# Altium PCB ARM2-2.5.PcbDoc (part 1 of 2)
Units mil, origin at the board's own origin, x right, y up, seen from the top; angles counter-clockwise.
Board outline 3929.03 x 3937.01 mil, 4 copper layers (Top Layer, VCC, GND, Bottom Layer); 147 components, 96 nets, 586 pads, 225 vias.
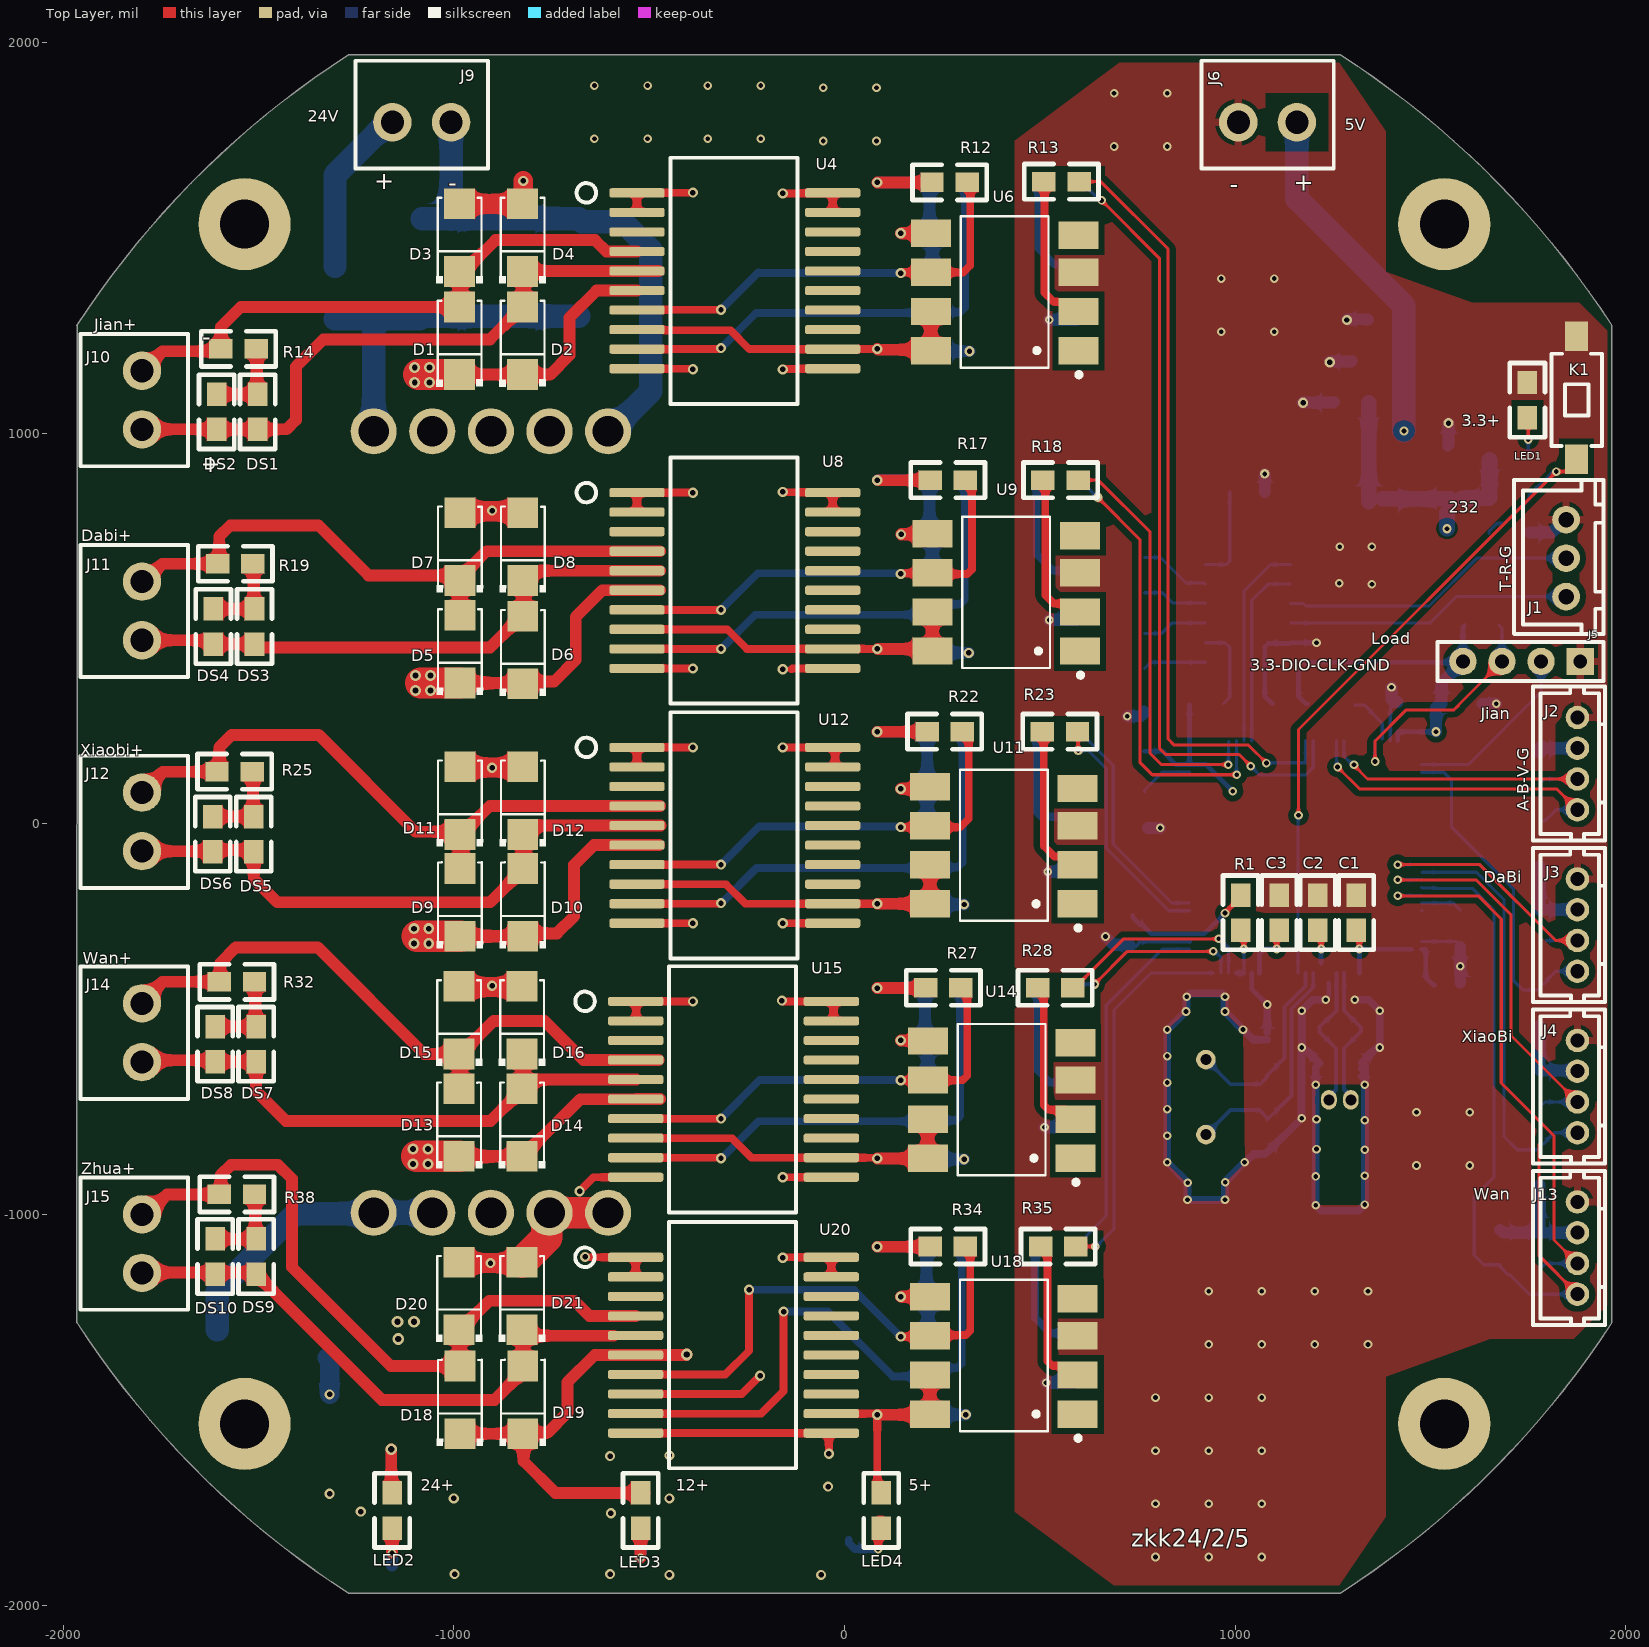
[diagram p0: Top Layer view]
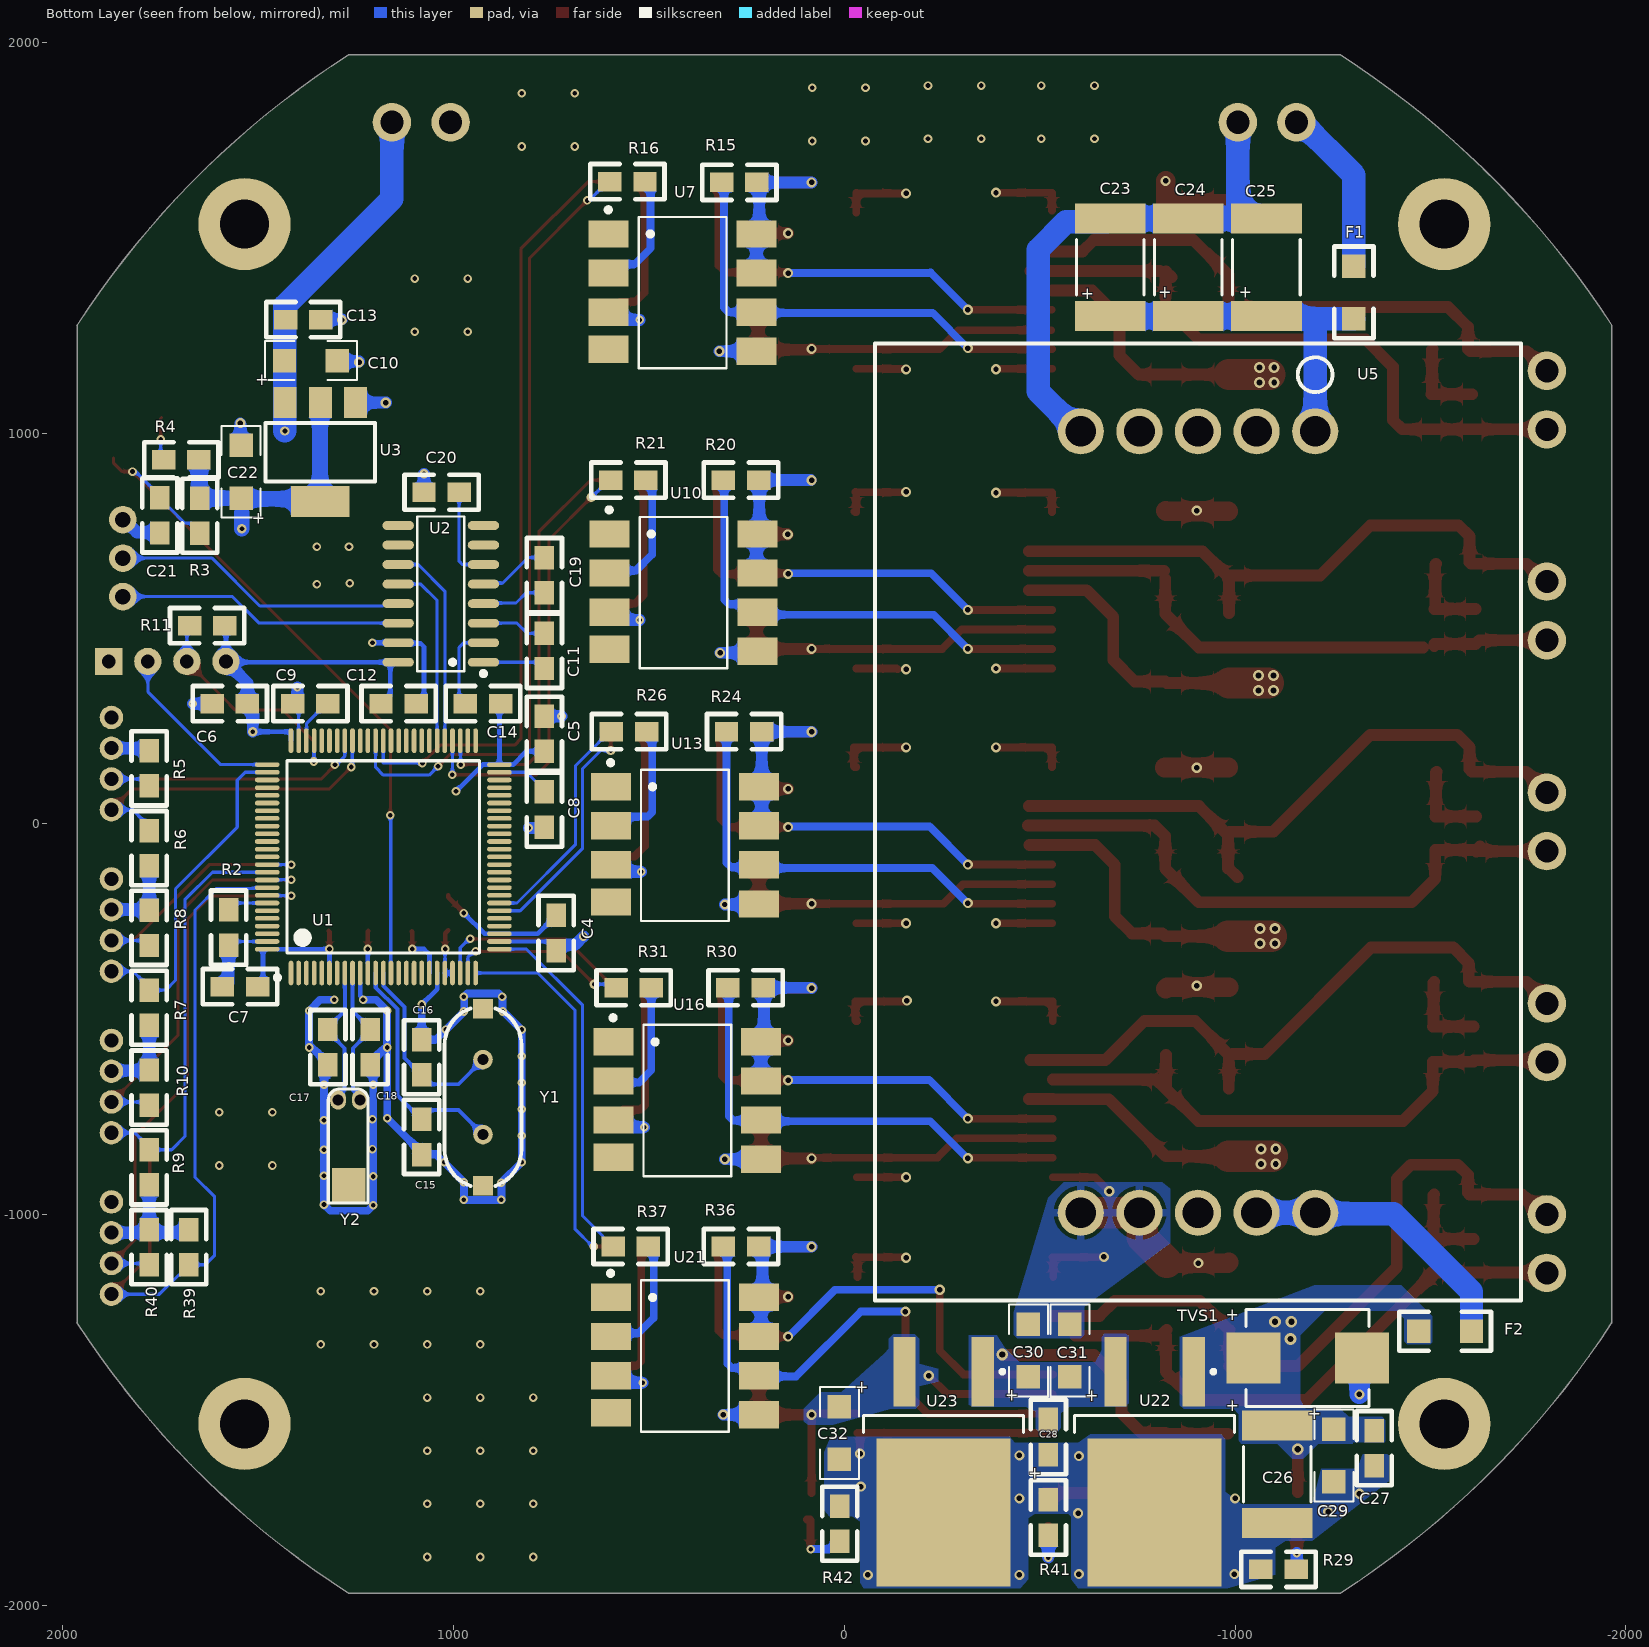
[diagram p1: Bottom Layer view, seen from below]
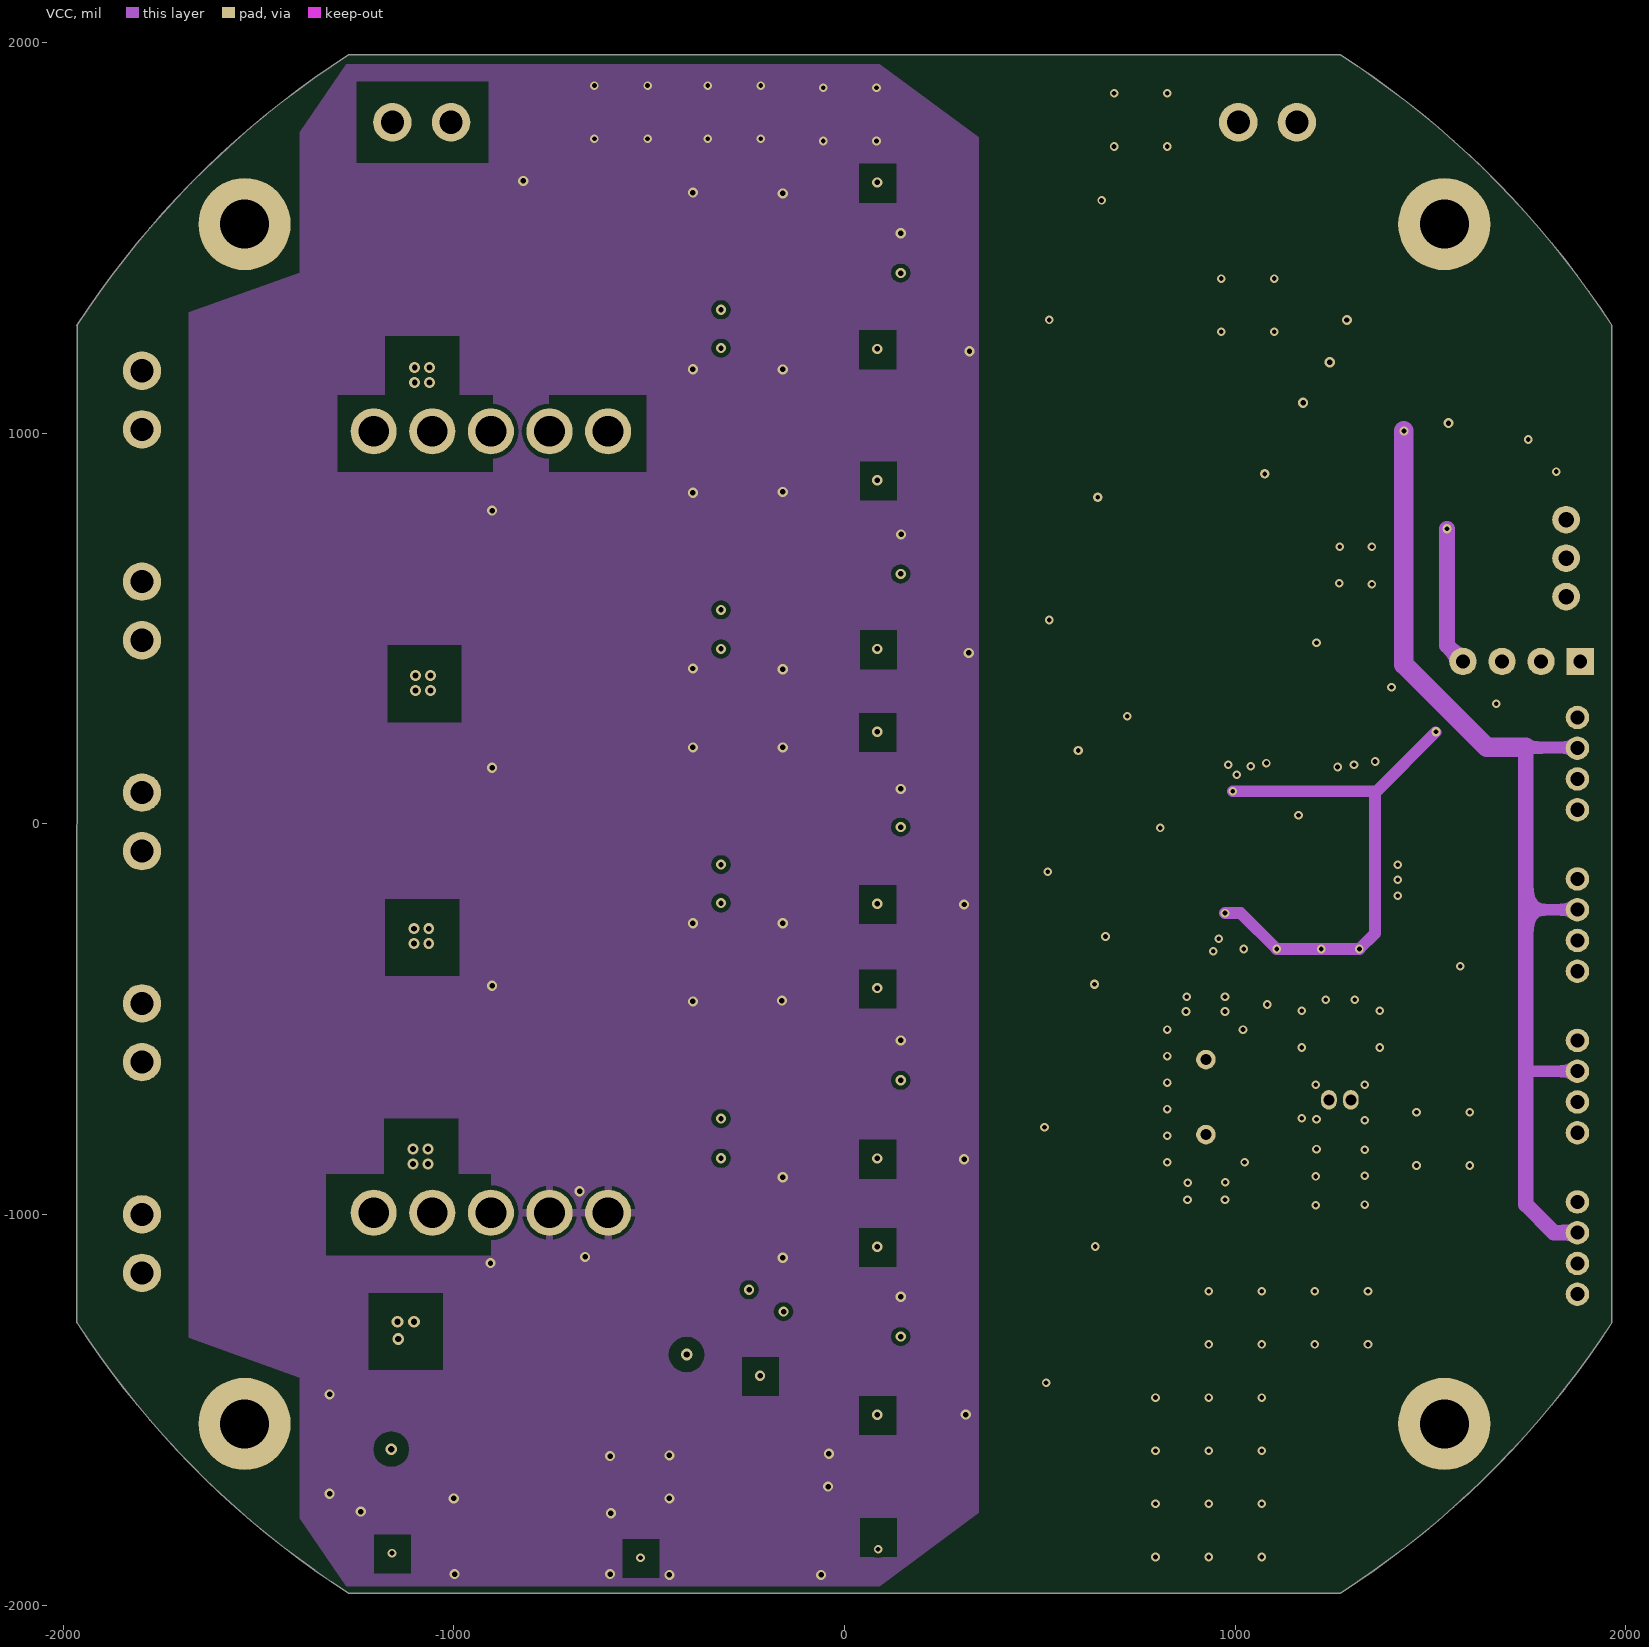
[diagram p2: VCC]
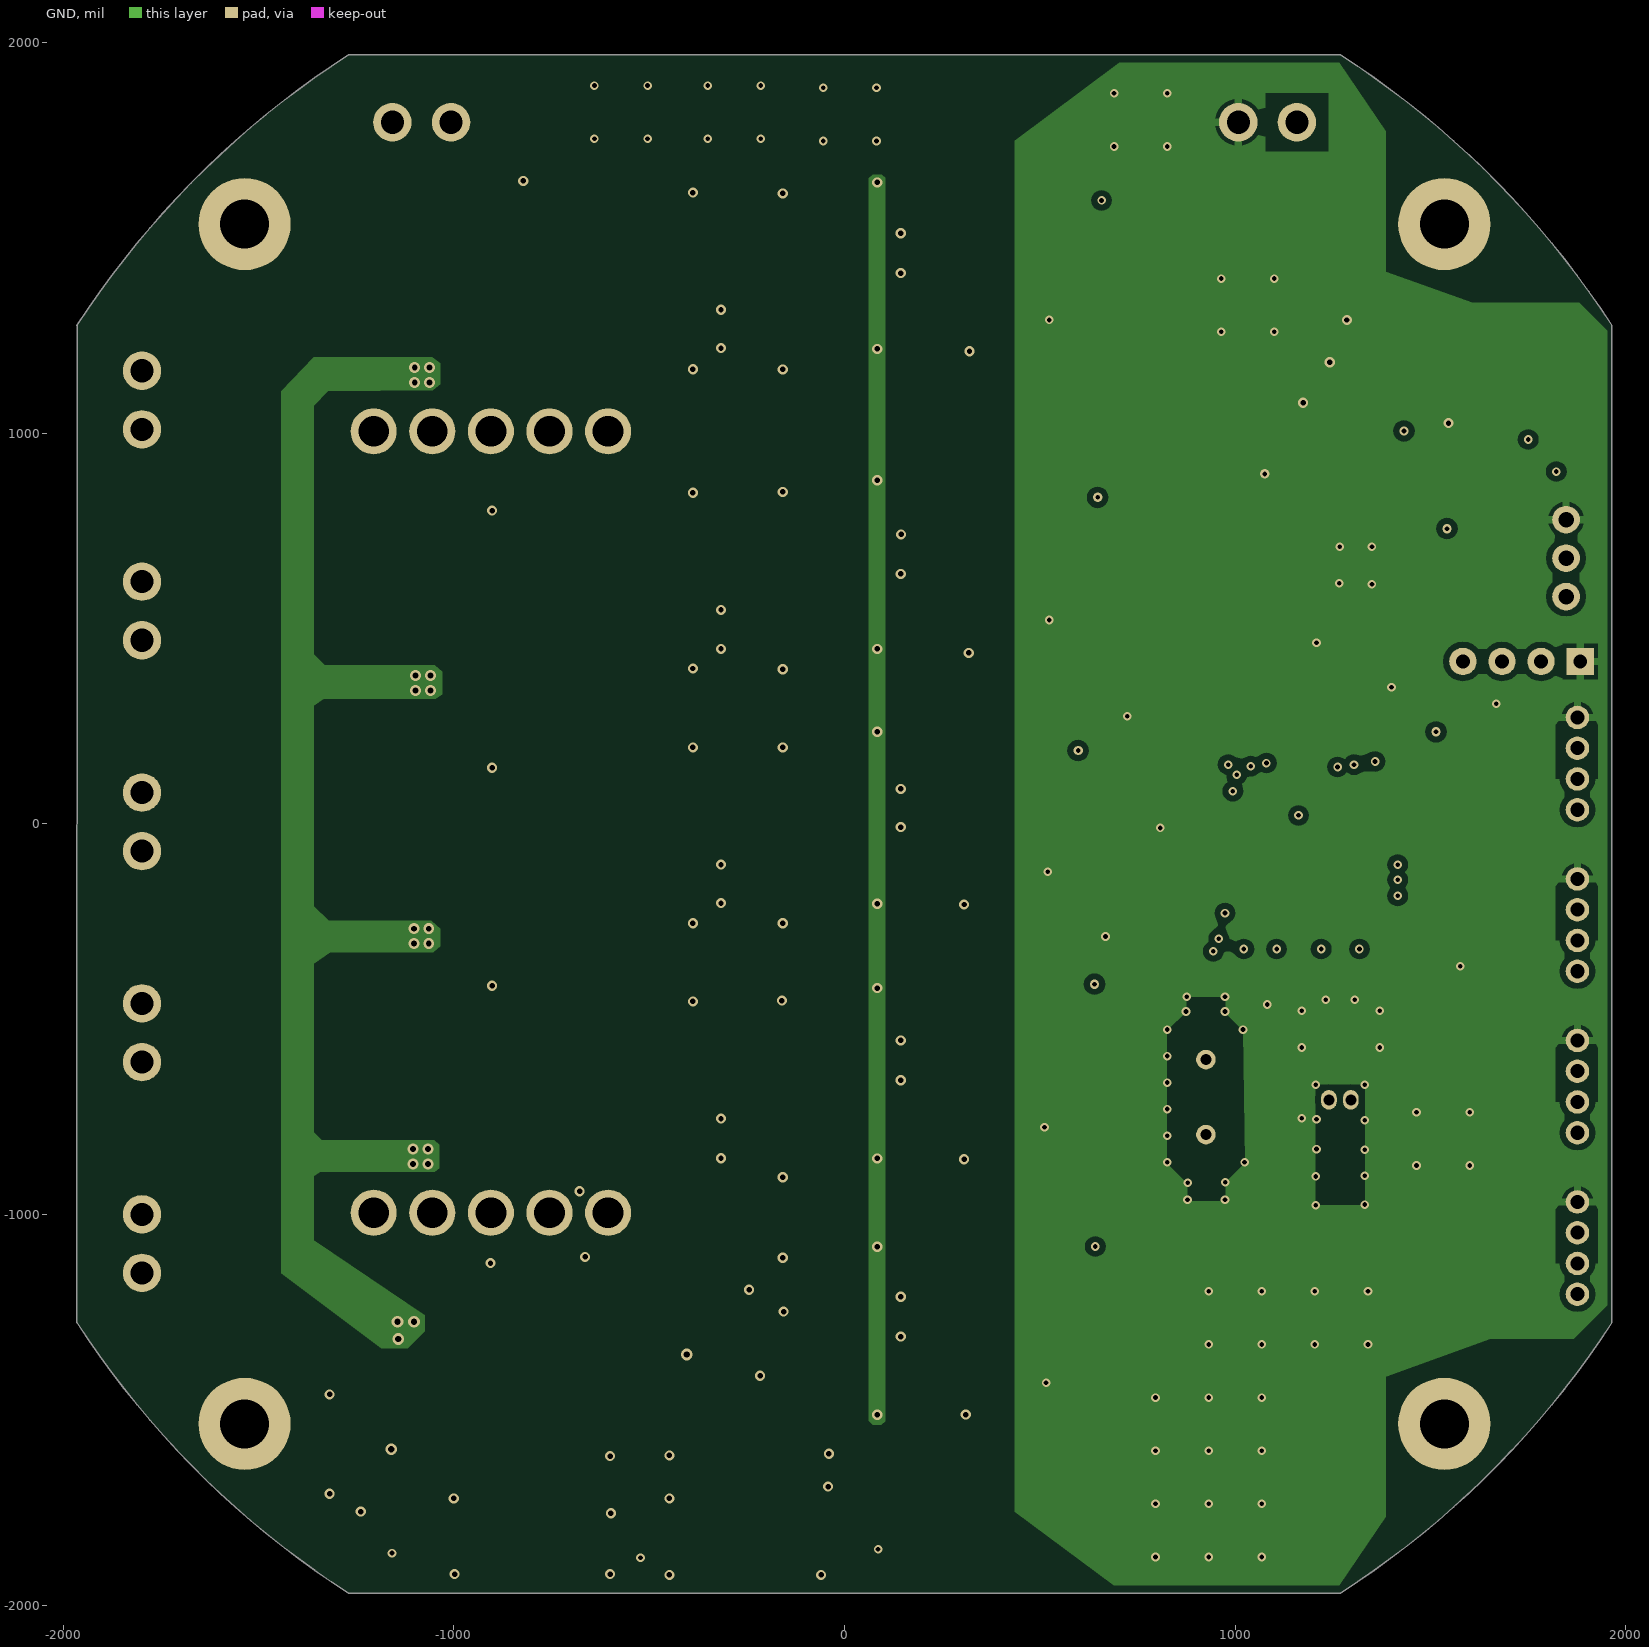
[diagram p3: GND]

## Layer stack, top to bottom
Top Solder: solder mask 0.4, Solder Resist, Dk 3.5
Top Layer: signal copper 1.4
Dielectric1: core 12.6, FR-4, Dk 4.8
VCC: signal copper 1.4
Dielectric2: prepreg 12.6, FR-4, Dk 4.8
GND: signal copper 1.4
Dielectric3: core 12.6, FR-4, Dk 4.8
Bottom Layer: signal copper 1.4
Bottom Solder: solder mask 0.4, Solder Resist, Dk 3.5

## Board outline
-1964.34,-1276.22 -1964,1275.83 -1964.6,1275.83 cw(c0,0) -1269.8,1968.5 1269.8,1968.5 cw(c0,0) 1964.34,1276.22 1964,1276 1964,-1275.83 1964.42,-1276.1 cw(c0,0) 1269.8,-1968.5 -1269.8,-1968.5 cw(c0,0)

## Design rules (kind name [scope] priority, off if disabled: settings)
Clearance GND1 [InNet('GND1')] p1: gap=15 ignorepadtopadclearanceinfootprint=TRUE
Clearance netcf [InNet('NetF1_1')  or InNet('NetC23_1')or InNet('NetC23_2')] p2: gap=30 ignorepadtopadclearanceinfootprint=TRUE
Clearance 3.3 [InNet('+3.3V')] p3: gap=15 ignorepadtopadclearanceinfootprint=TRUE
Clearance +5V [InNet('+5V')] p4: gap=20 ignorepadtopadclearanceinfootprint=FALSE
Clearance V5 [InNet('VCC_5V')] p5: gap=20 ignorepadtopadclearanceinfootprint=TRUE
Clearance Polygon [InNet('VCC_24V') or InNet('OUT1') or  InNet('OUT2') or  InNet('OUT3') or  InNet('OUT4') or  InNet('OUT5') or  InNet('OUT6') or  InNet('OUT7') or  InNet('OUT8') or  InNet('OUT9') or  InNet('OUT10') OR InNet('VCC_12V')] p6: gap=30 ignorepadtopadclearanceinfootprint=TRUE except(12: THPad-THPad THPad-Fill THPad-Poly THPad-Region)
Clearance [All] p7: gap=11 ignorepadtopadclearanceinfootprint=TRUE
FabricationTestPointUsage TestPointUsage [All] p1: valid=0 allowmultiple=FALSE
FabricationTestpoint Testpoint [All] p1: side=3 testpointundercomponent=TRUE minsize=40 maxsize=100 preferedsize=60 minholesize=0 maxholesize=40 preferedholesize=32 testpointgrid=1 allowsidetop=TRUE allowsidebottom=TRUE usegrid=TRUE gridtolerance=0.01
HoleSize [All] p1: absolutevalues=TRUE maxlimit=150 minlimit=10 maxpercent=80.000 minpercent=20.000
MinimumSolderMaskSliver [All] p1: minsoldermaskwidth=2
PlaneClearance [InNet('GND1')] p1: clearance=10
PolygonConnect PGND2B [OnBottomLayer{ InNet('GND2') }] p1: thpad.connectstyle=Relief thpad.reliefconductorwidth=20 thpad.reliefentries=4 thpad.polygonreliefangle="90 Angle" thpad.airgapwidth=10 smdpad.connectstyle=Direct smdpad.reliefconductorwidth=10 smdpad.reliefentries=4 smdpad.polygonreliefangle="90 Angle" smdpad.airgapwidth=10 via.connectstyle=Direct via.reliefconductorwidth=10 via.reliefentries=4 via.polygonreliefangle="90 Angle" via.airgapwidth=10
PolygonConnect PV24 [InNet('VCC_24V')] p2: thpad.connectstyle=Relief thpad.reliefconductorwidth=50 thpad.reliefentries=4 thpad.polygonreliefangle="90 Angle" thpad.airgapwidth=8 smdpad.connectstyle=Direct smdpad.reliefconductorwidth=30 smdpad.reliefentries=4 smdpad.polygonreliefangle="90 Angle" smdpad.airgapwidth=12 via.connectstyle=Direct via.reliefconductorwidth=10 via.reliefentries=4 via.polygonreliefangle="90 Angle" via.airgapwidth=10
PolygonConnect PV12 [InNet('VCC_12V')] p3: thpad.connectstyle=Relief thpad.reliefconductorwidth=10 thpad.reliefentries=4 thpad.polygonreliefangle="90 Angle" thpad.airgapwidth=10 smdpad.connectstyle=Direct smdpad.reliefconductorwidth=10 smdpad.reliefentries=4 smdpad.polygonreliefangle="90 Angle" smdpad.airgapwidth=10 via.connectstyle=Direct via.reliefconductorwidth=10 via.reliefentries=4 via.polygonreliefangle="90 Angle" via.airgapwidth=10
PolygonConnect PV5 [InNet('VCC_5V')] p4: connectstyle=Direct reliefconductorwidth=10 reliefentries=4 polygonreliefangle="90 Angle" airgapwidth=10
PolygonConnect PGND1 [InNet('GND1')] p5: thpad.connectstyle=Relief thpad.reliefconductorwidth=20 thpad.reliefentries=4 thpad.polygonreliefangle="90 Angle" thpad.airgapwidth=10 smdpad.connectstyle=Direct smdpad.reliefconductorwidth=12 smdpad.reliefentries=4 smdpad.polygonreliefangle="90 Angle" smdpad.airgapwidth=10 via.connectstyle=Direct via.reliefconductorwidth=12 via.reliefentries=4 via.polygonreliefangle="90 Angle" via.airgapwidth=10
PolygonConnect PGND2D [InComponent('D3')or  InComponent('D4') or InComponent('D7')or InComponent('D8')or InComponent('D11')or InComponent('D12')or InComponent('D15')or InComponent('D16')or InComponent('D20')or InComponent('D21')or  InComponent('C3')or  InComponent('C2')or   InComponent('C1')] p6: connectstyle=Direct reliefconductorwidth=10 reliefentries=4 polygonreliefangle="90 Angle" airgapwidth=10
PolygonConnect PGND2 [InNet('GND2')] p7: thpad.connectstyle=Relief thpad.reliefconductorwidth=20 thpad.reliefentries=4 thpad.polygonreliefangle="90 Angle" thpad.airgapwidth=10 smdpad.connectstyle=Relief smdpad.reliefconductorwidth=20 smdpad.reliefentries=4 smdpad.polygonreliefangle="90 Angle" smdpad.airgapwidth=10 via.connectstyle=Direct via.reliefconductorwidth=12 via.reliefentries=4 via.polygonreliefangle="90 Angle" via.airgapwidth=12
PolygonConnect [All] p8: connectstyle=Relief reliefconductorwidth=10 reliefentries=4 polygonreliefangle="90 Angle" airgapwidth=10
RoutingVias [All] p1: holewidth=7.5 width=15 viastyle="Through Hole" minholewidth=5 minwidth=10 maxholewidth=28 maxwidth=50
SilkToSilkClearance [All] p1: silktosilkclearance=1
SilkToSolderMaskClearance SilkscreenOverComponentPads [IsPad] p1: minsilkscreentomaskgap=1 clearancetoexposedcopper=TRUE
SolderMaskExpansion [All] p1: expansion=4 istentingtop=FALSE
Width [All] p1: maxlimit=200 minlimit=8 preferedwidth=10 toplayer_prefwidth=8 minimp=50.000000 maximp=50.000000 favimp=50.000000
23 further rules are at their usual default settings.

## Components (designator, comment, footprint, x,y, rotation, side; value= is the part's Value field where it differs from the comment)
C1 "104" 0805 1310,-272 r90 top
C2 "104" 0805 1211.33,-272 r90 top
C3 "104" 0805 1112.67,-272 r90 top
C4 "104" 0805 738,-234 r270 bottom
C5 "104" 0805 768,186 r90 bottom
C6 "104" 0805 1528,308 r0 bottom
C7 "104" 0805 1502,-416 r0 bottom
C8 "4.7uF" 0805 768,-8 r90 bottom
C9 "4.7uF" 0805 1412,308 r180 bottom
C10 "Cap Pol1" 钽电容小 1368,1180.83 r0 bottom value=10uF
C11 "104" 0805 768,488 r270 bottom
C12 "104" 0805 1186,308 r180 bottom
C13 "104" 0805 1340,1290.83 r0 bottom
C14 "104" 0805 970,308 r180 bottom
C15 "22pF" 0805 1082,-846 r90 bottom
C16 "22pF" 0805 1082,-552 r270 bottom
C17 "22pF" 0805 1322,-616 r90 bottom
C18 "22pF" 0805 1214,-616 r90 bottom
C19 "104" 0805 768,682 r270 bottom
C20 "104" 0805 1076,849 r180 bottom
C21 "104" 0805 1752,834.87 r270 bottom
C22 "Cap Pol1" 钽电容小 1539,899 r270 bottom value=10uF
C23 "Cap Pol1" 钽电容大 -680.15,1424.62 r180 bottom value=22uF
C24 "Cap Pol1" 钽电容大 -880.15,1424.62 r180 bottom value=100uF
C25 "Cap Pol1" 钽电容大 -1080.15,1424.62 r180 bottom value=100uF
C26 "Cap Pol1" 钽电容大 -1108,-1664 r0 bottom value=100uF
C27 "0.1uF" 0805 -1356,-1642.5 r90 bottom
C28 "0.1uF" 0805 -522,-1614 r90 bottom
C29 "Cap Pol1" 钽电容小 -1248,-1614 r90 bottom value=2.2uF
C30 "Cap Pol1" 钽电容小 -476,-1350 r270 bottom value=1uF
C31 "Cap Pol1" 钽电容小 -582,-1350 r270 bottom value=2.2uF
C32 "Cap Pol1" 钽电容小 18,-1556 r90 bottom value=1uF
D1 "Diode 1N4149" 肖特基二极管SS34 -984,1236.8 r90 top
D2 "Diode 1N4149" 肖特基二极管SS34 -822.85,1236.8 r90 top
D3 "Diode 1N4149" 肖特基二极管SS34 -984,1500.8 r90 top
D4 "Diode 1N4149" 肖特基二极管SS34 -822.85,1500.8 r90 top
D5 "Diode 1N4149" 肖特基二极管SS34 -983.15,447.39 r90 top
D6 "Diode 1N4149" 肖特基二极管SS34 -822,445.39 r90 top
D7 "Diode 1N4149" 肖特基二极管SS34 -983.15,709.96 r90 top
D8 "Diode 1N4149" 肖特基二极管SS34 -822,709.96 r90 top
D9 "Diode 1N4149" 肖特基二极管SS34 -983.15,-200.61 r90 top
D10 "Diode 1N4149" 肖特基二极管SS34 -822,-200.61 r90 top
D11 "Diode 1N4149" 肖特基二极管SS34 -983.15,59.96 r90 top
D12 "Diode 1N4149" 肖特基二极管SS34 -822,59.96 r90 top
D13 "Diode 1N4149" 肖特基二极管SS34 -985.15,-764 r90 top
D14 "Diode 1N4149" 肖特基二极管SS34 -824,-764 r90 top
D15 "Diode 1N4149" 肖特基二极管SS34 -985.15,-502.04 r90 top
D16 "Diode 1N4149" 肖特基二极管SS34 -824,-502.04 r90 top
D18 "Diode 1N4149" 肖特基二极管SS34 -983.15,-1474 r90 top
D19 "Diode 1N4149" 肖特基二极管SS34 -822,-1474 r90 top
D20 "Diode 1N4149" 肖特基二极管SS34 -985.15,-1208 r90 top
D21 "Diode 1N4149" 肖特基二极管SS34 -824,-1208 r90 top
DS1 "LED" 0805 -1502,1010 r90 top
DS2 "LED" 0805 -1607,1100 r270 top
DS3 "LED" 0805 -1510,460.5 r90 top
DS4 "LED" 0805 -1615,550.5 r270 top
DS5 "LED" 0805 -1512,-71 r90 top
DS6 "LED" 0805 -1617,19 r270 top
DS7 "LED" 0805 -1506,-608.5 r90 top
DS8 "LED" 0805 -1611,-518.5 r270 top
DS9 "LED" 0805 -1506,-1152 r90 top
DS10 "LED" 0805 -1611,-1062 r270 top
F1 "THERMAL FUSE" 1206 -1304,1428 r270 bottom
F2 "THERMAL FUSE" 1206 -1605,-1298 r0 bottom
J1 "CON3" CON3BB 1846.87,680.42 r90 top
J2 "CON4" CONN4B 1876,154.63 r90 top
J3 "CON4" CONN4B 1876,-258.7 r90 top
J4 "CON4" CONN4B 1876,-672.04 r90 top
J5 "CON4" CON4 1732.87,416 r0 top
J6 "CON2" CONN-TH_2P-P3.81_DB2EVC-3.81-2P-BK 1083,1796 r180 top
J9 "CON2" CONN-TH_2P-P3.81_DB2EVC-3.81-2P-BK -1082,1796 r180 top
J10 "CON2" CONN-TH_2P-P3.81_DB2EVC-3.81-2P-BK -1798,1085 r270 top locked
J11 "CON2" CONN-TH_2P-P3.81_DB2EVC-3.81-2P-BK -1798,545.25 r270 top locked
J12 "CON2" CONN-TH_2P-P3.81_DB2EVC-3.81-2P-BK -1798,5.5 r270 top locked
J13 "CON4" CONN4B 1876,-1085.37 r90 top
J14 "CON2" CONN-TH_2P-P3.81_DB2EVC-3.81-2P-BK -1798,-534.25 r270 top locked
J15 "CON2" CONN-TH_2P-P3.81_DB2EVC-3.81-2P-BK -1798,-1074 r270 top locked
K1 "KEY4" 按钮 1876,1086 r90 top
LED1 "LED" 0805 1748,1040 r90 top
LED2 "LED" 0805 -1158,-1712 r270 top
LED3 "LED" 0805 -522,-1712 r270 top
LED4 "LED" 0805 94,-1712 r270 top
R1 "10R" 0805 1014,-272 r90 top
R2 "10K" 0805 1576,-220 r270 bottom
R3 "1.5K" 0805 1650,744 r90 bottom
R4 "10K" 0805 1742,932 r180 bottom
R5 "10K" 0805 1779.41,-16.72 r270 bottom
R6 "10K" 0805 1779.41,97.57 r90 bottom
R7 "10K" 0805 1779.41,-425.29 r270 bottom
R8 "10K" 0805 1779.41,-311 r90 bottom
R9 "10K" 0805 1779.41,-833.86 r270 bottom
R10 "10K" 0805 1779.41,-719.57 r90 bottom
R11 "10K" 0805 1676,508 r180 bottom
R12 "332" 0805 224.04,1642.06 r0 top
R13 "201" 0805 600.36,1644.06 r180 top
R14 "10K" 0805 -1506,1216 r180 top
R15 "332" 0805 224.04,1642.06 r0 bottom
R16 "201" 0805 600.36,1644.06 r180 bottom
R17 "332" 0805 219.68,880.19 r0 top
R18 "201" 0805 598,880.19 r180 top
R19 "10K" 0805 -1514,666 r180 top
R20 "332" 0805 219.68,880.19 r0 bottom
R21 "201" 0805 598,880.19 r180 bottom
R22 "332" 0805 211.38,236.32 r0 top
R23 "201" 0805 596.36,236.32 r180 top
R24 "332" 0805 211.7,236.32 r0 bottom
R25 "10K" 0805 -1516,134 r180 top
R26 "201" 0805 596.36,236.32 r180 bottom
R27 "332" 0805 208.04,-419.21 r0 top
R28 "201" 0805 584.34,-419.21 r180 top
R29 "Res2" 0805 -1156,-1908 r0 bottom value=10K
R30 "332" 0805 208.04,-419.21 r0 bottom
R31 "201" 0805 584.34,-419.21 r180 bottom
R32 "10K" 0805 -1510,-404 r180 top
R34 "332" 0805 219.68,-1081.35 r0 top
R35 "201" 0805 592,-1081.35 r180 top
R36 "332" 0805 219.68,-1081.35 r0 bottom
R37 "201" 0805 592,-1081.35 r180 bottom
R38 "10K" 0805 -1510,-948 r180 top
R39 "10K" 0805 1678,-1128.15 r90 bottom
R40 "10K" 0805 1779.41,-1128.15 r90 bottom
R41 "10K" 0805 -522,-1820 r90 bottom
R42 "10K" 0805 12,-1836 r90 bottom
TVS1 "TVS" TVS -1185.62,-1366.45 r270 bottom
U1 "STM32F407VGT6" STM32F407VGT6 1178.94,-26 r180 bottom locked
U2 "MAX3232" MAX3232 1028.84,583.98 r90 bottom
U3 "AMS1117-3.3_C347222" AMS1117 1335.66,955 r0 bottom
U4 "L298P" L298P -280.7,1385.38 r180 top
U5 "URF4824QB-200W" URF4824QB-200W（24稳压） -910,0 r0 bottom locked
U6 "6n137" 6N137 410,1340 r0 top
U7 "6n137" 6N137 414.36,1381.94 r0 bottom
U8 "L298P" L298P -280.7,618.21 r180 top
U9 "6n137" 6N137 414,571 r0 top
U10 "6n137" 6N137 412,614 r0 bottom
U11 "6n137" 6N137 408,-76 r0 top
U12 "L298P" L298P -280.7,-34 r180 top
U13 "6n137" 6N137 408.36,-33.03 r0 bottom
U14 "6n137" 6N137 402.34,-727 r0 top
U15 "L298P" L298P -284,-684 r180 top
U16 "6n137" 6N137 402,-686 r0 bottom
U18 "6n137" 6N137 408,-1382 r0 top
U20 "L298P" L298P -284.24,-1339.06 r180 top
U21 "6n137" 6N137 408.36,-1340 r0 bottom
U22 "7812" 7812 -794,-1632 r180 bottom
U23 "7805" 7805 -254,-1632 r180 bottom
Y1 "XTAL8" XTAL8（晶振） 930,-688 r90 bottom locked
Y2 "XTAL32-100" XTAL32-100（晶振） 1270,-796 r270 bottom locked

## Footprints (in the part's own frame and the unit in brackets; to place one, negate y for a bottom-side part, rotate by r counter-clockwise, add the part's x,y. Pads: shape width x height; smd on the part's side, far side on the other; paste and mask are expansions set on the pad)
6N137 [mm]
  rect 2.6x1.78 smd mask+0.102: 1(4.796,-3.258) 2(4.796,-0.718) 3(4.796,1.822) 4(4.796,4.235) 5(-4.804,4.362) 6(-4.804,1.822) 7(-4.804,-0.718) 8(-4.804,-3.258)
  silkscreen extent -2.86,-4.98 4.98,5.47
0805 [mil]
  rect 60x50 smd: 1(0,0) 2(90,0)
  silkscreen extent -50,-45 140,45
1206 [mil]
  rect 60x60 smd: 1(0,0) 2(135,0)
  silkscreen extent -50,-50 185,50
7805 [mm]
  rect 1.45x4.5 smd: 1(2.54,5.848) 3(-2.54,5.848)
  rect 8.7x9.6 smd: 2(0,-3.302)
  silkscreen extent -5.2,1.9 5.2,5.97, body extent -5.2,-6.35 5.2,3, height 4.67
7812 [mm]
  rect 1.45x4.5 smd: 1(2.54,5.848) 3(-2.54,5.848)
  rect 8.7x9.6 smd: 2(0,-3.302)
  silkscreen extent -5.2,1.9 5.2,5.97, body extent -5.2,-6.35 5.2,3, height 4.67
AMS1117 [mil]
  rect 59x79 smd: 1(-84.88,-123.54) 2(5.67,-123.54) 3(96.22,-123.54)
  rect 150x79 smd: 4(6.34,130)
  silkscreen extent -134,-72 146,78
CON3BB [mm]
  round 1.8 hole 1 paste+0 mask+0.05: 1(-2.5,0) 2(0,0) 3(2.5,0)
  silkscreen extent -4.92,-2.44 5.09,3.38
CON4 [mil]
  rect 70x70 hole 35: 1(150,0)
  round 70 hole 35: 2(50,0) 3(-50,0) 4(-150,0)
  silkscreen extent -215,-50 210,50
CONN4B [mil]
  round 60 hole 36 paste+0 mask+1.97: 1(-118.11,0) 2(-39.37,0) 3(39.37,0) 4(118.11,0)
  silkscreen extent -197,-71 197,114
CONN-TH_2P-P3.81_DB2EVC-3.81-2P-BK [mm]
  round 2.5 hole 1.5: 1(-1.905,0) 2(1.905,0)
  silkscreen extent -4.3,-4 4.3,3
L298P [mm]
  rrect50% 3.6x0.6 smd: 1(6.361,-5.842) 2(6.361,-4.572) 3(6.361,-3.302) 4(6.361,-2.032) 5(6.361,-0.762) 6(6.361,0.508) 7(6.361,1.778) 8(6.361,3.048) 9(6.361,4.318) 10(6.361,5.588) 11(-6.361,5.588) 12(-6.361,4.318) 13(-6.361,3.048) 14(-6.361,1.778) 15(-6.361,0.508) 16(-6.361,-0.762) 17(-6.361,-2.032) 18(-6.361,-3.302) 19(-6.361,-4.572) 20(-6.361,-5.842)
  silkscreen extent -4.06,-8.13 10.28,7.87
MAX3232 [mil]
  oval 22.6x80.24 smd mask+4: 1(-169.98,-104.88) 2(-119.98,-104.88) 3(-69.98,-104.88) 4(-19.98,-104.88) 5(30.02,-104.88) 6(80.02,-104.88) 7(130.02,-104.88) 8(180.02,-104.88) 9(180.02,113.16) 10(130.02,113.16) 11(80.02,113.16) 12(30.02,113.16) 13(-19.98,113.16) 14(-69.98,113.16) 15(-119.98,113.16) 16(-169.98,113.16)
  silkscreen extent -205,-111 203,64
STM32F407VGT6 [mm]
  oval 0.3x1.6 smd paste-100 mask+0.051: 1(-6.032,-9.026) 2(-5.532,-9.026) 3(-5.032,-9.026) 4(-4.532,-9.026) 5(-4.032,-9.026) 6(-3.532,-9.026) 7(-3.032,-9.026) 8(-2.532,-9.026) 9(-2.032,-9.026) 10(-1.532,-9.026) 11(-1.032,-9.026) 12(-0.532,-9.026) 13(-0.032,-9.026) 14(0.468,-9.026) 15(0.968,-9.026) 16(1.468,-9.026) 17(1.968,-9.026) 18(2.468,-9.026) 19(2.968,-9.026) 20(3.468,-9.026) 21(3.968,-9.026) 22(4.468,-9.026) 23(4.968,-9.026) 24(5.468,-9.026) 25(5.968,-9.026) 51(5.968,6.073) 52(5.468,6.073) 53(4.968,6.073) 54(4.468,6.073) 55(3.968,6.073) 56(3.468,6.073) 57(2.968,6.073) 58(2.468,6.073) 59(1.968,6.073) 60(1.468,6.073) 61(0.968,6.073) 62(0.468,6.073) 63(-0.032,6.073) 64(-0.532,6.073) 65(-1.032,6.073) 66(-1.532,6.073) 67(-2.032,6.073) 68(-2.532,6.073) 69(-3.032,6.073) 70(-3.532,6.073) 71(-4.032,6.073) 72(-4.532,6.073) 73(-5.032,6.073) 74(-5.532,6.073) 75(-6.032,6.073)
  oval 1.6x0.3 smd paste-100 mask+0.051: 26(7.518,-7.476) 27(7.518,-6.977) 28(7.518,-6.476) 29(7.518,-5.977) 30(7.518,-5.476) 31(7.518,-4.977) 32(7.518,-4.476) 33(7.518,-3.977) 34(7.518,-3.476) 35(7.518,-2.977) 36(7.518,-2.477) 37(7.518,-1.976) 38(7.518,-1.477) 39(7.518,-0.976) 40(7.518,-0.477) 41(7.518,0.024) 42(7.518,0.523) 43(7.518,1.024) 44(7.518,1.523) 45(7.518,2.024) 46(7.518,2.523) 47(7.518,3.024) 48(7.518,3.523) 49(7.518,4.024) 50(7.518,4.523) 76(-7.582,4.523) 77(-7.582,4.024) 78(-7.582,3.523) 79(-7.582,3.024) 80(-7.582,2.523) 81(-7.582,2.024) 82(-7.582,1.523) 83(-7.582,1.024) 84(-7.582,0.523) 85(-7.582,0.024) 86(-7.582,-0.477) 87(-7.582,-0.976) 88(-7.582,-1.477) 89(-7.582,-1.976) 90(-7.582,-2.476) 91(-7.582,-2.977) 92(-7.582,-3.476) 93(-7.582,-3.977) 94(-7.582,-4.476) 95(-7.582,-4.977) 96(-7.582,-5.476) 97(-7.582,-5.977) 98(-7.582,-6.476) 99(-7.582,-6.977) 100(-7.582,-7.476)
  silkscreen extent -7.06,-9.47 6.22,4.77
TVS [mm]
  rect 3.3x3.5 smd: 1(0,3.525) 2(0,-3.525)
  silkscreen extent -3.15,-4 3.15,4
URF4824QB-200W（24稳压） [mm]
  round 3 hole 2: 1(-7.493,-25.527) 2(-3.683,-25.527) 3(0.127,-25.527) 4(3.937,-25.527) 5(7.747,-25.527) 6(7.747,25.273) 7(3.937,25.273) 8(0.127,25.273) 9(-3.683,25.273) 10(-7.493,25.273)
  silkscreen extent -20.87,-31.24 21.13,30.99
XTAL8（晶振） [mil]
  round 50 hole 28: 1(-107.13,-5) 2(85,-5)
  rect 50x50 smd: ""(-237.44,-5) ""(215.31,-5)
  silkscreen extent -238,-103 216,93
XTAL32-100（晶振） [mil]
  oval 50x40 hole 28: 1(-90,-26) 2(-90,30)
  rect 92.13x86 smd: ""(130,1)
  silkscreen extent -118,-51 174,51
按钮 [mm]
  rect 1.9x1.5 smd mask+0.102: 1(-3.876,0.059) 2(4.124,0.059)
  silkscreen extent -3.01,-1.61 2.99,1.69
肖特基二极管SS34 [mm]
  rect 2x2 smd: 1(-2.2,0.029) 2(2.2,0.029)
  silkscreen extent -2.98,-1.47 2.6,1.53
钽电容大 [mm]
  rect 4.6x1.95 smd: 1(0,-3.175) 2(0,3.175)
  silkscreen extent -2.2,-1.8 2.2,1.8
钽电容小 [mil]
  rect 60x60 smd: 1(65,-5) 2(-70,-5)
  silkscreen extent -120,-55 115,45

## Part data
C1 C2 C3 C4 C5 C6 C7 C8 C9 C27 C28: library part Cap, "Capacitor", LatestRevisionDate=17-Jul-2002, LatestRevisionNote="Re-released for DXP Platform.", PackageDescription="Radial Cap, Thru-Hole; 2 Leads; 0.3 in Pin Spacing", PackageReference=RAD-0.3, Published=8-Jun-2000, Publisher="Altium Limited"
C10 C22 C23 C24 C25 C26 C29 C30 C31 C32: "Polarized Capacitor (Radial)", LatestRevisionDate=17-Jul-2002, LatestRevisionNote="Re-released for DXP Platform.", PackageDescription="Polarized Capacitor (Radial); 2 Leads", PackageReference=RB7.6-15, Published=8-Jun-2000, Publisher="Altium Limited"
C11 C12 C13 C14 C15 C16 C17 C18 C19 C20 C21: library part CAP
D1 D2 D3 D4 D5 D6 D7 D8 D9 D10 D11 D12 D13 D14 D15 D16 D18 D19 D20 D21: "Computer Diode", Code_JEDEC=DO-204-AH, ComponentLink1Description="Manufacturer Link", ComponentLink1URL=http://www.national.com/, DatasheetVersion=1989, LatestRevisionDate=17-Jul-2002, LatestRevisionNote="Re-released for DXP Platform.", PackageDescription="Diode, Axial; Body 4.6 x 1.9 mm (LxDia. max), Lead Dia. 0.53 mm (max)", PackageReference=DO-35A, PackageVersion=1989, Published=8-Jun-2000, Publisher="Altium Limited"
DS1 DS2 DS3 DS4 DS5 DS6 DS7 DS8 DS9 DS10 LED1 LED2 LED3 LED4: PackageDocument=Feb-2002, LatestRevisionDate=17-Jul-2002, LatestRevisionNote="Re-released for DXP Platform.", PackageReference=3.2X1.6X1.1, Published=8-Jun-2000, Publisher="Altium Limited"
R1 R2 R4 R5 R6 R7 R8 R9 R10 R12 R13 R14 R15 R16 R17 R18 R19 R20 R21 R22 R23 R24 R25 R26 R27 R28 R30 R31 R32 R34 R35 R36 R37 R38 R39 R40 R41 R42: library part Res2, "Resistor", LatestRevisionDate=17-Jul-2002, LatestRevisionNote="Re-released for DXP Platform.", PackageDescription="Axial Device, Thru-Hole; 2 Leads; 0.4 in Pin Spacing", PackageReference=AXIAL-0.4, Published=8-Jun-2000, Publisher="Altium Limited"
R3 R11: library part RES
R29: "Resistor", LatestRevisionDate=17-Jul-2002, LatestRevisionNote="Re-released for DXP Platform.", PackageDescription="Axial Device, Thru-Hole; 2 Leads; 0.4 in Pin Spacing", PackageReference=AXIAL-0.4, Published=8-Jun-2000, Publisher="Altium Limited"
TVS1: library part 稳压二极管, "Zener Diode"
U1: "ARM Cortex-M4 32b MCU+FPU, 210DMIP, 1024 kB Flash, 192+4 kB RAM, Camera, 82 I/Os, 100-pin LQFP, -40 to +85癈, Tray", Operating Frequency (Processor Speed)=168MHz, 16-bit Timers (IC/OC/PWM)=12x16-bit(24/24/30), 32-bit Timer (IC/OC/PWM)="2x32-bit (8/8/8)", A/D Converter=16x12-bit, ComponentLink1Description="Manufacturer URL", ComponentLink1URL=http://www.st.com/, ComponentLink2Description="STM32F405/7 Datasheet", ComponentLink2URL=http://www.st.com/internet/com/TECHNICAL_RESOURCES/TECHNICAL_LITERATURE/DATASHEET/DM00037051.pdf, ComponentLink3Description="STM32F4 Web Page", ComponentLink3URL=http://www.st.com/internet/mcu/subclass/1521.jsp, D/A Converter=2x12-bit, DatasheetVersion="rev2, Jan-2012", Internal RAM=192kB, Other Timer Functions="2xWDG, RTC, 24-bit down counter", PackageDescription="100-Pin Low Profile Quad Flat Package, 14x14 mm Body, 0.5 mm Pitch", PackageReference=LQFP100, PackageVersion=2012, Serial Interface="3xSPI/2xI2S/2xI2C/3xUSART(IrDa, ISO7816)/3xUART/2xUSB OTG FS/HS, 2xCAN/Ethernet MAC10/100, SDIO"
U3: Dropout Voltage=1.3V@(1A), JLCPCB Part Class="Extended Part", LCSC Part Name=AMS1117-3.3, Manufacturer=UMW(广东友台半导体), Maximum Input Voltage=18V, Output Current=1A, Output Voltage=3.3V, Power Supply Rejection Ratio (PSRR)=60dB@(120Hz), Add into BOM=yes, Convert to PCB=yes, Datasheet=https://atta.szlcsc.com/upload/public/pdf/source/20211011/50CC665C22E3A66C08379A4A74BDA25C.pdf, Device=AMS1117-3.3_C347222, Manufacturer Part=AMS1117-3.3, Name=AMS1117-3.3, Number of Outputs=1, Output Polarity=正, Output Type=固定, Supplier=LCSC, Supplier Footprint=SOT-223, Supplier Part=C347222, Symbol=AMS1117-3.3_C347222
U22: library part L7912CV
Y1 Y2: LatestRevisionDate=17-Jul-2002, LatestRevisionNote="Re-released for DXP Platform.", Published=8-Jun-2000, Publisher="Altium Limited"

## Free pads (board coordinates)
  round 236.22 hole 125.98: 0(1535.43,1535.43) 1(-1535.43,1535.43) 2(1535.43,-1535.43) 3(-1535.43,-1535.43)

## Via types
v1: diameter 22, hole 12, Top Layer to Bottom Layer, 120 vias
v2: diameter 26, hole 14, Top Layer to Bottom Layer, 77 vias
v3: diameter 28, hole 15, Top Layer to Bottom Layer, 16 vias
v4: diameter 24, hole 12, Top Layer to Bottom Layer, 7 vias
v5: diameter 30, hole 16, Top Layer to Bottom Layer, 5 vias

## Nets (pads, with @x,y where several pads share a name; then routed paths per layer and width w, separated by ;. In a path a pad name is that pad's centre, name@x,y a point inside that pad or via, vN(x,y) a via of type N, cw(c..) or ccw(c..) an arc to the next point about the centre after c; other vN are vias at no path point)
+3.3V: C1.1 C2.1 C3.1 C4.1 C5.1 C6.1 C7.1 C12.1 C14.2 C22.1 J5.4 R1.2 R3.2 R4.2 R11.2 U1.6 U1.11 U1.19 U1.28 U1.50 U1.75 U1.100 U2.16 U3.2 U3.4 | length 4705
  Top Layer w12: v1(974,-228) 974,-227 1014,-187 R1.2@1014,-182 ; v1(1106,-320) 1106,-276 C3.1@1107,-275 ; C2.1@1218.66,-274 1220,-275.34 v1(1220,-320) ; v1(1318,-320) 1318,-276 C1.1@1320,-274
  VCC w30: v1(974,-228) 1014,-228 v1(1106,-320) v1(1318,-320) 1358,-280 1358,80 v4@1512.62,234.62 ; v1(994,84) 1362,84
  VCC w40: v4(1542,756) 1542,456.87 J5.4@1582.87,416
  Bottom Layer w12: C4.1@738,-234 738,-239 757,-258 762,-258 785.06,-281.06 U1.28@882.97,-281.06 ; C5.1@768,186 814.06,186 847.97,152.09 U1.50@882.97,152.09 ; U1.28@882.97,-280.98 921.02,-280.98 v1(974,-228) ; C14.2@882.97,305.03 U1.50@882.97,152.09 ; v1(994,84) 925.91,152.09 U1.50@882.97,152.09 ; U1.19@1062.1,-381.37 1062.1,-333.9 1076,-320 v1(1106,-320) ; U2.16@1142,414 U2.16@1162,414 ; C12.1@1186,308 1181,308 1162,327 U2.16@1162,414 ; U1.11@1219.67,-355.87 1219.67,-320.33 v1(1220,-320) ; U1.6@1318.01,-381.37 v1(1318,-320) 1318.26,-320.26 U1.100@1451.95,-320.26 ; U1.75@1416.43,213.11 1416.43,235.91 1416.52,236 v4(1514,236) ; U1.100@1477.45,-320.35 1487.91,-320.35 1488,-320.44 1488,-393 1507,-412 C7.1@1510,-412 ; J5.4@1580.87,414 U2.16@1162,414 ; J5.4@1582.87,416 1582.87,504.87 R11.2@1586,508
  Bottom Layer w30: v4(1514,236) 1514,298 1524,308 C6.1@1528,308 1528,361.13 J5.4@1582.87,416
  Bottom Layer w40: U3.4@1342,825 1342.22,825.22 U3.2@1342.22,1077.66 ; U3.4@1376.75,832 C22.1@1550.1,832 ; v4(1542,756) 1542,796.5 ; 1579.5,834 R3.2@1650,834 1651,835 1651,931 R4.2@1652,932
+5V: C10.1 C13.2 J2.3 J3.3 J4.3 J6.1 J13.3 R5.2 R6.2 R7.2 R8.2 R9.2 R10.2 R39.2 R40.2 U3.3 | length 4460.7
  VCC w30: 1744,-632.67 J4.3@1876,-632.67 ; 1744,-219.33 J3.3@1876,-219.33 ; 1744,196 J2.3@1874,196
  VCC w40: 1744,196 1744,-219.33 1744,-632.67 1744,-974 1816,-1046 J13.3@1876,-1046 ; J2.3@1874,196 J2.3@1876,194
  VCC w50: v4(1432,1006) 1432,408 1644,196 1744,196
  Bottom Layer w30: R39.2@1678,-1038.15 1685.85,-1046 1771.55,-1046 R40.2@1779.41,-1038.15 R9.2@1779.41,-923.86 ; R7.2@1779.41,-515.29 R10.2@1779.41,-629.57 1780.95,-631.12 1874.45,-631.12 J4.3@1876,-632.67 ; R8.2@1779.41,-221 R8.2@1779.41,-219.33 ; R5.2@1779.41,-106.72 R8.2@1779.41,-219.33 ; R40.2@1781,-1046 J13.3@1876,-1046 ; R6.2@1784.41,194 J2.3@1876,194 ; J3.3@1876,-219.33 R8.2@1779.41,-219.33
  Bottom Layer w40: R6.2@1779.41,187.57 1779.41,189 R6.2@1784.41,194
  Bottom Layer w60: J6.1@1158,1796 1158,1600 1431.88,1326.12 1431.88,1185.83 U3.3@1431.88,1078.54 ; v4(1432,1006) U3.3@1432,1069.04
A1: J2.1 R5.1 U1.67 | length 827.5
  Top Layer w8: v1(1262,146) 1318,90 1822.52,90 J2.1@1876,36.52
  Bottom Layer w8: U1.67@1258.95,213.03 1259.68,212.3 1259.68,148.32 v1(1262,146) ; R5.1@1788,8 1793,8 1821.52,36.52 J2.1@1876,36.52
A2: J3.1 R7.1 U1.77 | length 843.1
  Bottom Layer w8: U1.77@1477.45,132.41 1533.59,132.41 1554,112 1554,-8 1712,-166 1712,-400 1737.29,-425.29 R7.1@1779.41,-425.29 ; R7.1@1788,-409.55 1790.14,-409.55 1800.41,-399.29 1800.41,-397.15 1820.74,-376.81 J3.1@1876,-376.81
A3: J4.1 R9.1 U1.90 | length 1056.4
  Bottom Layer w8: U1.90@1477.95,-123.5 1617.5,-123.5 1688,-194 1688,-800 1721.86,-833.86 R9.1@1779.41,-833.86 R9.1@1779.41,-828.86 ; R9.1@1788,-818.7 1789.57,-818.7 1800.41,-807.86 1800.41,-806.29 1816.55,-790.15 J4.1@1876,-790.15
A4: J13.1 R39.1 U1.92 | length 1903.7
  Top Layer w8: 1778,-820 1778,-1105.48 J13.1@1876,-1203.48
  Bottom Layer w8: U1.92@1477.45,-162.87 1478.18,-163.6 1506.46,-163.6 1507.49,-164.63 1606.63,-164.63 1662,-220 1662,-904 1612,-954 1612,-1104 1636.15,-1128.15 R39.1@1678,-1128.15 1678,-1133.15 1699,-1154.15 1704,-1154.15 1753.33,-1203.48 1874.52,-1203.48 J13.1@1876,-1202 ; 1818,-1203.48 J13.1@1876,-1203.48
B1: J2.2 R6.1 U1.68 | length 751.5
  Top Layer w8: v1(1304,152) 1304,150 1338.74,115.26 J2.2@1876,115.26
  Bottom Layer w8: U1.68@1278.64,213.03 1278.64,173.57 1300.21,152 v1(1304,152) ; R6.1@1788,112 1791.26,115.26 J2.2@1876,115.26
B2: J3.2 R8.1 U1.89 | length 684.4
  Top Layer w8: v1(1416,-104) 1626,-104 1820.07,-298.07 J3.2@1876,-298.07
  Bottom Layer w8: v1@1414,-104 1414.1,-103.91 1477.35,-103.91 U1.89@1477.45,-103.81 ; R8.1@1795.48,-298.07 J3.2@1876,-298.07
B3: J4.2 R10.1 U1.91 | length 1034.7
  Top Layer w8: v1@1413.28,-143.18 1617.18,-143.18 1706,-232 1706,-541.41 J4.2@1876,-711.41
  Bottom Layer w8: v1@1414,-142.46 1478.18,-142.46 U1.91@1477.45,-143.19 ; R10.1@1788,-716.7 1793.29,-711.41 J4.2@1876,-711.41
  other v1: 1416,-143
B4: J13.2 R40.1 U1.93 | length 1412.8
  Top Layer w8: v1@1412,-184 1622,-184 1681,-243 1681,-663 1816,-798 1816,-1064.74 J13.2@1876,-1124.74
  Bottom Layer w8: v1@1412,-184 1412.72,-183.28 1476.72,-183.28 U1.93@1477.45,-182.56 ; R40.1@1788,-1131.55 1794.81,-1124.74 J13.2@1876,-1124.74
  other v1: 1416,-184
GND1: C1.2 C2.2 C3.2 C4.2 C5.2 C6.2 C7.2 C8.1 C9.1 C10.2 C12.2 C13.1 C15.1 C16.1 C17.1 C18.1 C20.1 C21.2 C22.2 J1.3 J2.4 J3.4 J4.4 J5.1 J6.2 J13.4 K1.2 LED1.2 R2.2 U1.10 U1.20 U1.27 U1.74 U1.99 U2.15 U3.1 U6.3 U7.3 U9.3 U10.3 U11.3 U13.3 U14.3 U16.3 U18.3 U21.3 | length 4849.7
  Bottom Layer w8: U1.74@1396.75,213.11 1396.75,294.75 C9.1@1408,306 ; C9.1@1412,308 C9.1@1416,312 ; U1.99@1477.45,-300.67 1566.67,-300.67 R2.2@1576,-310
  Bottom Layer w10: C4.2@738,-324 C4.2@738,-320.76 ; C4.2@745.62,-313.15 758,-300.76 U1.27@882.87,-300.76
  Bottom Layer w12: v1(826,-526.16) v1@827.02,-526.16 ; v1@873.18,-480 v1(874.2,-480) v1@875.2,-479 ; v1@875.2,-443 v1(876.2,-442) ; U1.27@882.87,-300.76 U1.27@882.97,-300.67 ; v1@972.92,-480 972,-480 v1@973,-479 ; v1@973.91,-961.91 v1(974,-962) ; v1@1020,-528 v1@1020,-527.08 ; v1(1024,-865.36) v1@1025.64,-865.36 ; U1.20@1042.41,-381.37 1042.41,-422.41 v1(1082,-462) ; C15.1@1076.03,-844.97 1082,-839 C15.1@1084,-839 ; C12.2@1096,308 1095,308 1076,327 1076,454 1083.97,461.97 1139.97,461.97 U2.15@1142,464 v1(1208,464) ; v1(1170,-478) v1@1171,-479 ; v1@1171,-571 1173.91,-573.91 v1@1176.91,-573.91 ; C18.1@1206.29,-622.71 C18.1@1216,-613 ; v1(1232,-450) 1232,-447.29 1239.27,-440.03 U1.10@1239.27,-406.87 ; C17.1@1324,-611 C17.1@1332,-619 ; v1@1330,-896 v1@1332,-894 ; v1@1330.04,-900.58 v1(1332,-900.62) v1(1332,-900.62) ; v1@1332,-837.62 1327.38,-833 1328.38,-833 v1@1332,-829.38 ; v1(1332,-758) v1@1332,-752.17 ; v1@1364,-478 1364,-480.71 v1@1370,-486.71
  Bottom Layer w20: v1(826,-526.16) v1(826,-594) v1(826,-661.84) v1(826,-729.68) v1(826,-797.52) v1(826,-865.36) 878,-917.36 v1@878,-958 ; v1@827.02,-526.16 v1@873.18,-480 ; v1@875.2,-479 v1@875.2,-443 ; v1(876.2,-442) 876.74,-442 884.74,-434 965.46,-434 973.46,-442 v1(974,-442) ; v1(878,-962) v1(974,-962) ; v1@972.92,-480 v1@1020,-527.08 ; v1@973,-479 v1@973,-443 ; v1@973.91,-961.91 973.91,-916.09 v1@1024,-866 ; v1(1020,-526.16) 1045.84,-552 C16.1@1082,-552 ; v1@1025.64,-865.36 1046.03,-844.97 C15.1@1076.03,-844.97 ; C16.1@1082,-533 v1(1082,-462) ; C15.1@1084,-839 v1(1170,-753) v1(1170,-572) ; v1(1170,-478) 1198,-450 v1(1232,-450) ; v1@1171,-571 v1@1171,-479 ; v1@1176.91,-573.91 C18.1@1216,-613 ; v1@1205.71,-975 v1@1205.71,-902 ; v1(1206,-976) 1220,-990 1316,-990 v1(1332,-974) ; v1(1206,-902) v1(1205.96,-667.52) ; v1@1206.29,-667.18 C18.1@1206.29,-622.71 ; v1(1306,-450) 1342,-450 v1(1370,-478) ; C17.1@1324,-611 1370,-565 v1@1370,-486.71 ; v1@1332,-969.38 v1(1332,-900.62) ; v1@1332,-894 v1@1332,-837.62 ; v1@1332,-829.38 v1(1332,-758) ; v1@1332,-752 v1(1332,-667.52) C17.1@1332,-619
  Bottom Layer w30: v1(512,-776) 592,-776 U16.3@608,-760 ; v1(516,-1430) 588,-1430 U21.3@608,-1410 ; v1(520,-122) 584.84,-122 U13.3@605.84,-101 ; v1@524,1290 v1(524.09,1290.09) 524.18,1290.18 594.18,1290.18 U7.3@614,1310 ; v1(524.12,522.12) 524.24,522.24 596.24,522.24 U10.3@616,542 ; v1(668,-288) 689,-309 729.47,-309 C4.2@730.47,-310 ; v1(724,276) 758,276 766,284 C5.2@766,288.5 ; C8.1@776,-10 v1(808,-10) ; C20.1@1076,849 v4(1076,896) ; v2@1172.54,1078.54 U3.1@1250.54,1078.54 ; v2@1242,1184 1296.17,1184 C10.2@1298,1185.83 ; U3.1@1250.78,1078.54 U3.1@1250.54,1078.54 ; U3.1@1252.67,1080.67 U3.1@1250.54,1078.54 ; v2@1286,1292 1338.83,1292 C13.1@1340,1290.83 C13.1@1335,1290.83 ; v1(1400,350) 1400,318 1406,312 C9.1@1416,312 ; C22.2@1544,969 1546,971 v2(1546,1026) ; C7.2@1576,-406 R2.2@1576,-314 ; C6.2@1632,308 v1(1668,308) ; C21.2@1754,746 1810.42,746 1843.27,778.85 J1.3@1846.87,778.85
  other v1: 796,-1876 932,-1876 1068,-1876 796,-1740 932,-1740 1068,-1740 796,-1604 932,-1604 1068,-1604 796,-1468 932,-1468 1068,-1468 932,-1332 1068,-1332 1204,-1332 1340,-1332 932,-1196 1068,-1196 1204,-1196 1340,-1196 878.52,-918.41 974.44,-917.14 1464,-874 1600,-874 1332,-834 1208,-832 1208,-756 1464,-738 1600,-738 1370,-572 974,-480 1576,-364 1350,614 1266,616 1268,710 1350,710 964,1260 1100,1260 964,1396 1100,1396 690,1734 826,1734 690,1870 826,1870
  other v2: 1174,1078 1242,1182 1286,1290
GND2: C26.2 C27.1 C28.1 C29.2 C30.2 C31.2 C32.2 D3.2 D4.2 D7.2 D8.2 D11.2 D12.2 D15.2 D16.2 D20.2 D21.2 R29.2 R41.2 R42.2 TVS1.1 U4.1 U4.2 U4.10 U4.11 U4.19 U4.20 U5.6 U5.7 U6.5 U7.5 U8.1 U8.2 U8.10 U8.11 U8.19 U8.20 U9.5 U10.5 U11.5 U12.1 U12.2 U12.10 U12.11 U12.19 U12.20 U13.5 U14.5 U15.1 U15.2 U15.10 U15.11 U15.19 U15.20 U16.5 U18.5 U20.1 U20.2 U20.10 U20.11 U20.19 U20.20 U21.5 U22.2 U23.2 | length 5562.1
  Top Layer w20: v2(-678,-940) -642.21,-904.21 U15.10@-533.13,-904.21 ; v2(-664,-1108) -662.91,-1108 -661.85,-1109.06 -532.86,-1109.06 -534.67,-1110.87 U20.2@-534.67,-1159.06 ; U20.10@-534.67,-1559.06 U20.11@-33.8,-1559.06 -38.19,-1559.06 -40,-1560.87 v2(-40,-1612) ; U15.2@-533.13,-504.21 -533.13,-454.21 -532.92,-454 v2(-388,-454) ; U12.10@-531.13,-254 v2(-388,-254) ; U12.2@-531.13,146 U12.1@-531.13,196 v2(-388,196) ; U8.10@-531.13,398.21 -531.03,398.11 -388.11,398.11 v2(-388,398) ; U8.2@-531.13,798.21 U8.1@-531.13,848.21 -531.03,848.11 -388.11,848.11 v2(-388,848) ; U4.10@-531.13,1165.38 -389.38,1165.38 v2(-388,1164) ; U4.2@-531.13,1570 U4.1@-531.13,1615.38 ; U4.1@-529.69,1615.69 -388.31,1615.69 v2(-388,1616) ; v2(-160,-452) -158.38,-452 -156.16,-454.21 U15.20@-32.27,-454.21 ; v2(-158,-1110) -157.46,-1110 -156.52,-1109.06 U20.20@-33.8,-1109.06 ; v2(-158,-904) -157.89,-904.11 -32.37,-904.11 U15.11@-32.27,-904.21 ; v2(-158,-254) U12.11@-30.27,-254 ; v2(-158,196) U12.20@-30.27,196 -24,196 -24,147.81 -25.81,146 U12.19@-30.27,146 ; v2(-158,1163.69) -156.85,1164.84 -124.54,1164.84 -124,1165.38 U4.11@-30.27,1165.38 ; v2(-158,1614) -32.08,1614 -30.27,1612.19 U4.19@-30.27,1565.38 ; v2@-154,850 -153.11,849.11 -28.92,849.11 U8.20@-28.02,850 ; -136,396 -135.46,396 -133.25,398.21 U8.11@-30.27,398.21 ; U20.20@-34,-1110 -33.8,-1110.2 U20.19@-33.8,-1159.06 ; U15.19@-32.27,-504.21 -29.81,-504.21 -28,-502.4 U15.20@-28,-454.21 ; U20.20@-32,-1110 U20.20@-30,-1108 ; U4.20@-30.58,1615.69 U4.20@-30.27,1615.38 ; U8.20@-30.27,848.21 U8.19@-30.27,798.21 -27.81,798.21 U8.19@-26,800.02
  Top Layer w30: v2(144,-1210) U18.5@212.58,-1210 ; v2(144,-554) U14.5@207.25,-554 ; v2(144,90) 213.14,90 U11.5@215.14,92 ; v2(144,1512) U6.5@212,1512 ; v2(145,741) 146,742 U9.5@220,742
  Top Layer w50: D20.2@-984,-1121.39 -981.39,-1124 v2(-906,-1124) D21.2@-824,-1124 ; D15.2@-984,-417.43 -826.57,-417.43 D16.2@-822,-422 ; D3.2@-982.85,1587.41 D4.2@-824,1587.41 -822,1589.41 v2(-822,1646) ; D11.2@-982,144.57 -820.57,144.57 D12.2@-820,144 ; D7.2@-982,800.57 -823.43,800.57 D8.2@-822,802
  Top Layer w80: D21.2@-825.15,-1121.39 -762.29,-1058.53 -762.29,-1002.29 U5.7@-755,-995 U5.6@-605,-995
  Bottom Layer w30: U16.5@214.16,-858 v2(306,-858) ; U21.5@218.86,-1511.72 v2(310.28,-1511.72) ; U13.5@223.66,-206 v2(306,-206) ; U7.5@224.88,1210.22 319.78,1210.22 v2(320,1210) ; U10.5@225.16,438 v2(318,438)
  Bottom Layer w50: TVS1.1@-1324.4,-1366.45 -1318,-1372.85 v2(-1318,-1460)
  other v1: -54,1748 82,1748 -640,1754 -504,1754 -350,1754 -214,1754 -54,1884 82,1884 -640,1890 -504,1890 -350,1890 -214,1890
  other v2: -448,-1922 -60,-1922 -998,-1920 -600,-1920 -598,-1764 -1238,-1760 -1000,-1726 -448,-1726 -1318,-1714 -42,-1696 -600,-1618 -448,-1616 -902,-414 -902,144 -158,396 -902,802 -158,850
IN1: R12.2 U4.7 U6.6 | length 1117.1
  Top Layer w20: U4.7@-530.51,1316 v2(-316,1316) ; v2(144,1410) 145.62,1410 147.62,1412 220.58,1412 U6.6@220.86,1411.72 304,1411.72 322,1429.72 322,1634.1 R12.2@314.04,1642.06
  Bottom Layer w20: v2(-316,1316) -220,1412 -218,1410 v2(144,1410)